# Altium PCB USB-HUB-H.pcbdoc (part 2 of 2)
Units mil, origin at the board's own origin, x right, y up, seen from the top; angles counter-clockwise.
Board outline 2972.16 x 4462.97 mil, 2 copper layers (Top Layer, Bottom Layer); 133 components, 134 nets, 513 pads, 306 vias.
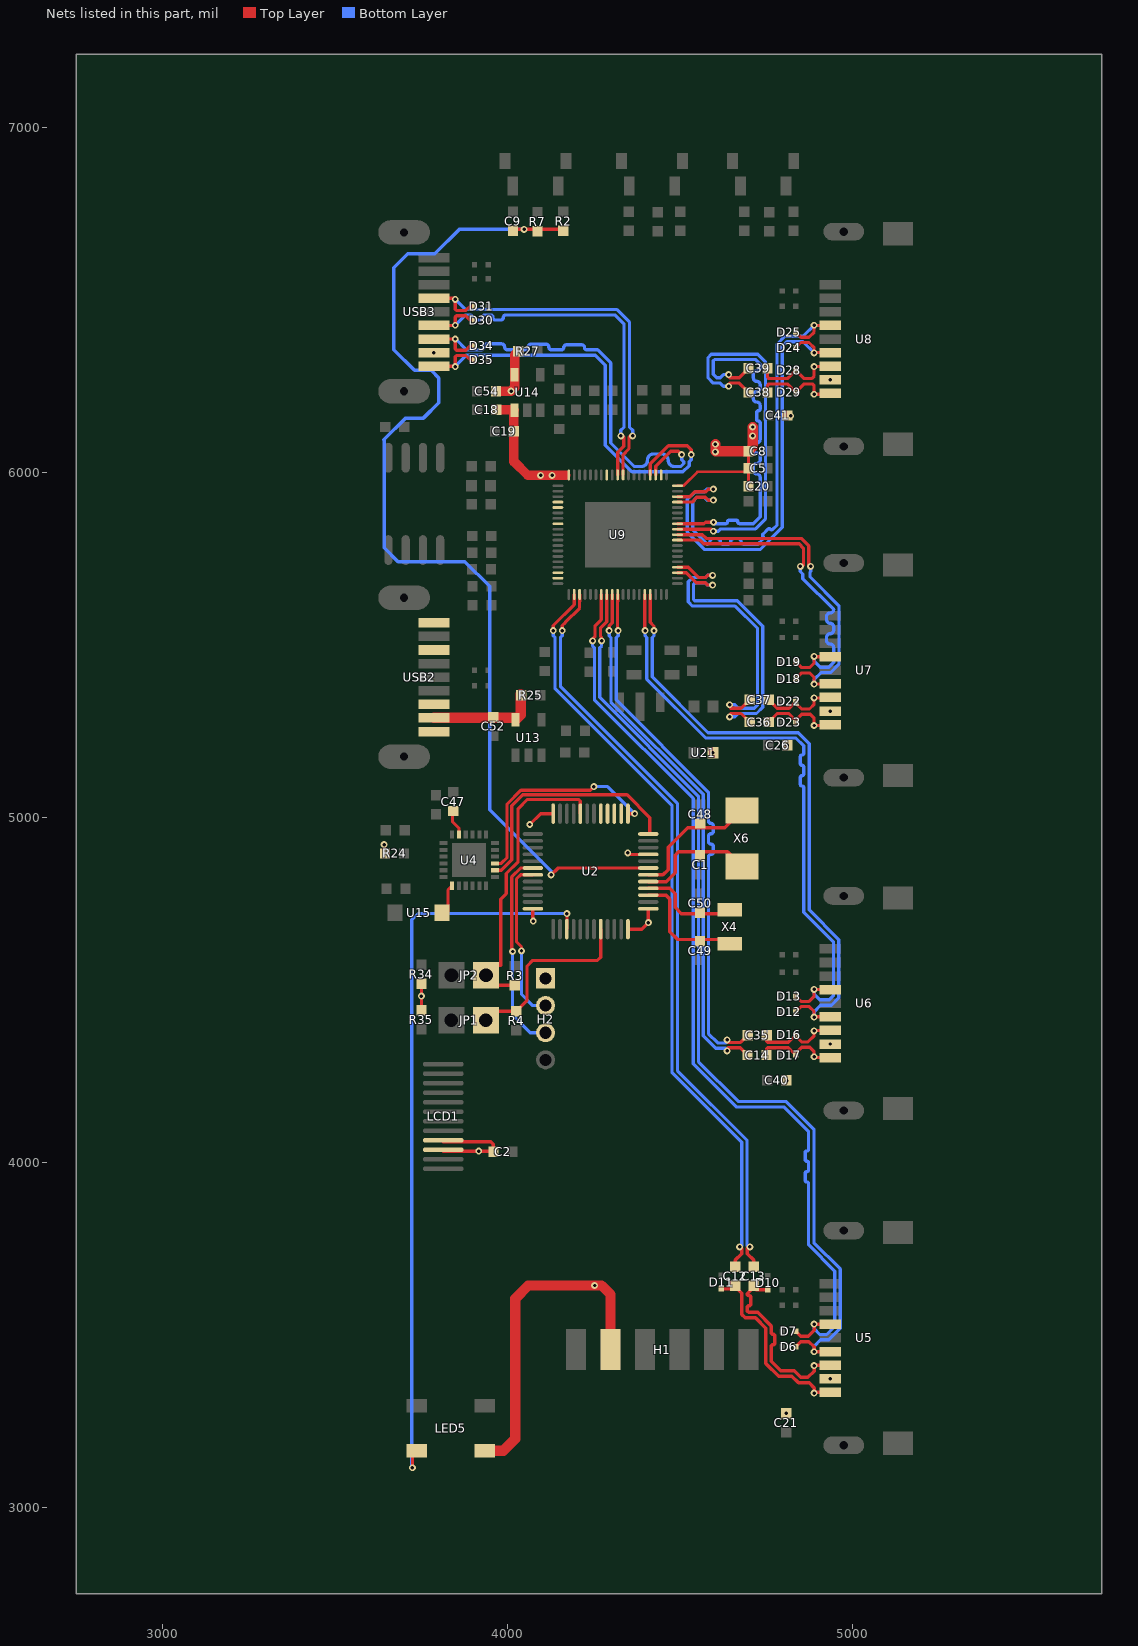
[diagram p2: the nets of this part, all layers, seen from the top]

## Via types
v1: diameter 20, hole 10, Top Layer to Bottom Layer, 300 vias
v2: diameter 18, hole 9, Top Layer to Bottom Layer, 5 vias
v3: diameter 20, hole 9, Top Layer to Bottom Layer, 1 vias

## Nets (pads, with @x,y where several pads share a name; then routed paths per layer and width w, separated by ;. In a path a pad name is that pad's centre, name@x,y a point inside that pad or via, vN(x,y) a via of type N, cw(c..) or ccw(c..) an arc to the next point about the centre after c; other vN are vias at no path point) (continued)
SSTX0_N: D34.2 U9.22 USB3.8 | length 1355.7
  Top Layer w9.53: USB3.8@3787.4,6386.97 v1(3849.09,6387) ; v1(3849.09,6387) 3849.09,6358.13 3852.46,6354.77 3879.91,6354.77 3892.14,6367 D34.2@3904.78,6367 ; U9.22@4429.88,5993.2 4429.88,6013.72 4429.8,6013.8 4429.8,6018.57 4473.23,6062 4495.09,6062 v1(4505.09,6052)
  Bottom Layer w9.5: v1(3849.09,6387) 3850.09,6387 3881.59,6355.5 3923.42,6355.5 ccw(c3923.42,6364.2) 3932.12,6364.2 cw(c3940.83,6364.2) 3940.83,6372.91 3983.42,6372.91 cw(c3983.42,6364.2) 3992.12,6364.2 ccw(c4000.83,6364.2) 4000.83,6355.5 4052.05,6355.5 ccw(c4052.05,6363.75) 4060.3,6363.75 cw(c4068.55,6363.75) 4068.55,6372 4112.05,6372 cw(c4112.05,6363.75) 4120.3,6363.75 ccw(c4128.55,6363.75) 4128.55,6355.5 4156.18,6355.5 ccw(c4156.18,6362.75) 4163.43,6362.75 cw(c4170.68,6362.75) 4170.68,6370 4216.18,6370 cw(c4216.18,6362.75) 4223.43,6362.75 ccw(c4230.68,6362.75) 4230.68,6355.5 4261.59,6355.5 4299.34,6317.75 4299.34,6085.67 4367.51,6017.5 4387.85,6017.5 ccw(c4387.85,6035.75) 4406.1,6035.75 cw(c4424.35,6035.75) 4424.35,6054 4447.85,6054 cw(c4447.85,6035.75) 4466.1,6035.75 ccw(c4484.35,6035.75) 4484.35,6017.5 4502.59,6017.5 4511.34,6026.25 4511.34,6031 4505.09,6037.25 v1(4505.09,6052)
SSTX0_P: D35.2 U9.23 USB3.9 | length 1354.5
  Top Layer w9.53: USB3.9@3787.4,6308.24 3847.85,6308.24 v1(3849.09,6307) 3849.09,6335.87 3852.46,6339.23 3879.91,6339.23 3892.14,6327 D35.2@3904.78,6327 ; U9.23@4414.18,5993.2 4414.18,6013.72 4414.27,6013.8 4414.27,6025 4466.8,6077.53 4521.56,6077.53 4533.09,6066 v1(4533.09,6052)
  Bottom Layer w9.5: v1(3849.09,6307) 3849.09,6308 3881.09,6340 4255.17,6340 4283.84,6311.33 4283.84,6079.25 4361.09,6002 4509.01,6002 4526.84,6019.83 4526.84,6031 4533.09,6037.25 v1(4533.09,6052)
SSTX1_N: C13.1 U9.60 | length 2215.6
  Top Layer w9.5: v1(4159.09,5542) 4159.09,5556.75 4167.59,5565.25 4167.59,5565.59 4209.33,5607.33 4209.33,5626.15 4209.48,5626.3 U9.60@4209.48,5646.8
  Top Layer w10: v1(4703.09,3756) 4699.02,3756 4695.48,3752.46 4695.48,3736.61 4714.09,3718 C13.1@4714.09,3698
  Bottom Layer w9.5: v1(4159.09,5542) 4159.09,5527.25 4153.84,5522 4153.84,5380.13 4492.95,5041.02 4492.95,4267.05 4694.59,4065.41 4694.59,3759.36 4697.95,3756 v1(4703.09,3756)
SSTX1_P: C12.1 U9.59 | length 2216.2
  Top Layer w9.5: v1(4133.09,5542) 4133.09,5556.75 4193.83,5617.49 4193.83,5626.15 4193.68,5626.3 U9.59@4193.68,5646.8
  Top Layer w10: C12.1@4660.87,3698 4660.87,3718 4679.48,3736.61 4679.48,3752.46 4675.95,3756 v1(4673.09,3756)
  Bottom Layer w9.5: v1(4133.09,5542) 4133.09,5527.25 4138.34,5522 4138.34,5373.71 4477.45,5034.6 4477.45,4260.63 4679.09,4058.99 4679.09,3759.36 4675.73,3756 v1(4673.09,3756)
SSTX1_R_N: C13.2 D10.2 U5.8 | length 551.3
  Top Layer w10: C13.2@4714.09,3643 C13.2@4714.09,3639 ; D10.2@4754.09,3632.32 4720.78,3632.32 C13.2@4714.09,3639 ; U5.8@4935.67,3413.26 4889.09,3413.26 v1(4889.09,3412) 4889.09,3396 4870.77,3377.68 4850.48,3377.68 4831.12,3397.04 4792.68,3397.04 4765.09,3424.63 4765.09,3467.43 cw(c4770.09,3467.43) 4770.09,3472.43 ccw(c4770.09,3477.43) 4775.09,3477.43 4775.09,3497.43 ccw(c4770.09,3497.43) 4770.09,3502.43 cw(c4770.09,3507.43) 4765.09,3507.43 4765.09,3526.63 4725.72,3566 4699.09,3566 4695.09,3570 4695.09,3580 cw(c4700.09,3580) 4700.09,3585 ccw(c4700.09,3590) 4705.09,3590 4705.09,3610 ccw(c4700.09,3610) 4700.09,3615 cw(c4700.09,3620) 4695.09,3620 C13.2@4714.09,3639
SSTX1_R_P: C12.2 D11.2 U5.9 | length 554.7
  Top Layer w10: D11.2@4619.87,3634.32 4652.18,3634.32 C12.2@4660.87,3643 4660.87,3639.92 4679.09,3621.7 4679.09,3560 4689.09,3550 4719.09,3550 4749.09,3520 4749.09,3418 4786.05,3381.04 4824.49,3381.04 4843.86,3361.68 4874.42,3361.68 4889.09,3347 v1@4889.09,3334.52 ; v1(4889.09,3332) v1@4889.09,3334.52 ; U5.9@4935.67,3334.52 v1@4889.09,3334.52
SSTX2_N: C35.1 U9.67 | length 1558.6
  Top Layer w9.5: v1@4319.53,5548 4319.53,5626.15 4319.68,5626.3 U9.67@4319.68,5646.8
  Top Layer w9.53: v1(4637.09,4356) 4637.09,4351.82 4640.46,4348.45 4676.05,4348.45 C35.1@4697.09,4369.5
  Bottom Layer w9.5: v1(4321.09,5542) 4321.09,5527.25 4315.84,5522 4315.84,5341.17 4582.95,5074.06 4582.95,4990.34 ccw(c4590.02,4990.34) 4590.02,4983.27 cw(c4590.02,4976.2) 4597.09,4976.2 4597.09,4960.34 cw(c4590.02,4960.34) 4590.02,4953.27 ccw(c4590.02,4946.2) 4582.95,4946.2 4582.95,4930.34 ccw(c4590.02,4930.34) 4590.02,4923.27 cw(c4590.02,4916.2) 4597.09,4916.2 4597.09,4900.34 cw(c4590.02,4900.34) 4590.02,4893.27 ccw(c4590.02,4886.2) 4582.95,4886.2 4582.95,4374.06 4610.05,4346.96 4633.73,4346.96 4637.09,4350.32 v1(4637.09,4356)
SSTX2_P: C14.1 U9.66 | length 1560.4
  Top Layer w9.5: v1(4295.09,5542) 4295.09,5555.44 4303.88,5564.22 U9.66@4303.88,5646.8
  Top Layer w9.53: v1(4637.09,4324) 4637.09,4329.55 4640.46,4332.92 4675.05,4332.92 C14.1@4696.09,4311.87
  Bottom Layer w9.5: v1(4295.09,5542) 4295.09,5527.25 4300.34,5522 4300.34,5334.75 4567.45,5067.64 4567.45,4367.64 4603.63,4331.46 4633.73,4331.46 4637.09,4328.1 v1(4637.09,4324)
SSTX2_R_N: C35.2 D16.2 U6.8 | length 241.1
  Top Layer w9.3: D16.2@4835.81,4367 4853.16,4349.65 4870.74,4349.65 4889.09,4368 v1(4889.09,4382) 4890.35,4383.26 U6.8@4935.67,4383.26
  Top Layer w9.53: C35.2@4752.09,4369.5 4751.59,4369 4751.59,4352.14 4754.96,4348.77 4814.57,4348.77 D16.2@4835.81,4370
SSTX2_R_P: C14.2 D17.2 U6.9 | length 241.1
  Top Layer w9.3: D17.2@4835.81,4317 4853.16,4334.35 4876.74,4334.35 4889.09,4322 v1(4889.09,4307) 4891.57,4304.52 U6.9@4935.67,4304.52
  Top Layer w9.53: C14.2@4751.09,4311.87 4751.09,4329.86 4754.46,4333.23 4814.57,4333.23 D17.2@4835.81,4312
SSTX3_N: C37.1 U9.4 | length 872.8
  Top Layer w9.5: U9.4@4492.88,5725.5 4513.38,5725.5 4513.48,5725.4 4524.65,5725.4 4554.3,5695.75 4574.09,5695.75 4580.34,5702 v1(4595.09,5702)
  Top Layer w9.53: v1(4644.09,5327) 4644.09,5320.64 4647.46,5317.27 4677.48,5317.27 C37.1@4702.22,5342
  Bottom Layer w9.5: v1(4595.09,5702) 4580.34,5702 4574.09,5695.75 4536.67,5695.75 4524.23,5683.31 4524.23,5625.58 4536.67,5613.14 4659.95,5613.14 4725.09,5548 4725.09,5326.75 4715.59,5317.25 4668.59,5317.25 4658.84,5327 v1(4644.09,5327)
SSTX3_P: C36.1 U9.3 | length 872.9
  Top Layer w9.5: U9.3@4492.88,5709.8 4513.38,5709.8 4513.48,5709.9 4518.23,5709.9 4547.88,5680.25 4574.09,5680.25 4580.34,5674 v1(4595.09,5674)
  Top Layer w9.53: v1(4644.09,5292) 4644.09,5298.36 4647.46,5301.73 4677.48,5301.73 C36.1@4702.22,5277
  Bottom Layer w9.5: v1(4595.09,5674) 4580.34,5674 4574.09,5680.25 4543.09,5680.25 4539.73,5676.89 4539.73,5632 4543.09,5628.64 4666.37,5628.64 4740.59,5554.42 4740.59,5320.22 4722.12,5301.75 4668.59,5301.75 4658.84,5292 v1(4644.09,5292)
SSTX3_R_N: C37.2 D22.2 U7.8 | length 232
  Top Layer w9.3: D22.2@4835.81,5332 4853.16,5314.65 4875.74,5314.65 4889.09,5328 v1(4889.09,5347) 4934.41,5347 U7.8@4935.67,5348.26
  Top Layer w9.53: C37.2@4757.22,5342 4781.95,5317.27 4816.36,5317.27 4831.09,5332 4835.81,5332 D22.2@4835.81,5337
SSTX3_R_P: C36.2 D23.2 U7.9 | length 235.8
  Top Layer w9.3: D23.2@4835.81,5282 4853.16,5299.35 4877.74,5299.35 4889.09,5288 v1(4889.09,5267) 4933.15,5267 U7.9@4935.67,5269.52
  Top Layer w9.53: C36.2@4757.22,5277 4781.95,5301.73 4815.36,5301.73 4835.09,5282 4835.81,5282 D23.2@4835.81,5277
SSTX4_N: C39.1 U9.12 | length 1117.9
  Top Layer w9.5: U9.12@4492.88,5851.5 4513.38,5851.5 4513.48,5851.4 4569.74,5851.4 4574.34,5856 v3(4597.09,5856)
  Top Layer w9.53: v1(4641.09,6284) 4641.09,6278.14 4644.46,6274.77 4671.86,6274.77 C39.1@4699.09,6302
  Bottom Layer w9.5: v3(4597.09,5856) 4597.09,5853.66 4598.75,5852 4633.08,5852 ccw(c4633.08,5857) 4638.08,5857 cw(c4643.08,5857) 4643.08,5862 4663.08,5862 cw(c4663.08,5857) 4668.08,5857 ccw(c4673.08,5857) 4673.08,5852 4713.09,5852 4732.59,5871.5 4732.59,5986.44 ccw(c4722.84,5986.44) 4722.84,5996.19 cw(c4722.84,6005.94) 4713.09,6005.94 4713.09,6016.44 cw(c4722.84,6016.44) 4722.84,6026.19 ccw(c4722.84,6035.94) 4732.59,6035.94 4732.59,6046.44 ccw(c4722.84,6046.44) 4722.84,6056.19 cw(c4722.84,6065.94) 4713.09,6065.94 4713.09,6076.44 cw(c4722.84,6076.44) 4722.84,6086.19 ccw(c4722.84,6095.94) 4732.59,6095.94 4732.59,6144.05 ccw(c4727.59,6144.05) 4727.59,6149.05 cw(c4727.59,6154.05) 4722.59,6154.05 4722.59,6174.05 cw(c4727.59,6174.05) 4727.59,6179.05 ccw(c4727.59,6184.05) 4732.59,6184.05 4732.59,6194.55 ccw(c4722.84,6194.55) 4722.84,6204.3 cw(c4722.84,6214.05) 4713.09,6214.05 4713.09,6224.55 cw(c4722.84,6224.55) 4722.84,6234.3 ccw(c4722.84,6244.05) 4732.59,6244.05 4732.59,6254.55 ccw(c4722.84,6254.55) 4722.84,6264.3 cw(c4722.84,6274.05) 4713.09,6274.05 4713.09,6284.55 cw(c4722.84,6284.55) 4722.84,6294.3 ccw(c4722.84,6304.05) 4732.59,6304.05 4732.59,6314.5 4719.73,6327.36 4600.45,6327.36 4597.09,6324 4597.09,6284.25 4606.59,6274.75 4617.09,6274.75 4626.34,6284 v1(4641.09,6284)
SSTX4_P: C38.1 U9.11 | length 1112.8
  Top Layer w9.5: U9.11@4492.88,5835.8 4513.38,5835.8 4513.48,5835.9 4591.35,5835.9 4597.09,5830.16 v1(4597.09,5830)
  Top Layer w9.53: v1(4641.09,6250) 4641.09,6255.86 4644.46,6259.23 4671.86,6259.23 C38.1@4699.09,6232
  Bottom Layer w9.5: v1(4597.09,5830) 4611.84,5830 4618.34,5836.5 4719.51,5836.5 4748.09,5865.08 4748.09,6320.92 4726.15,6342.86 4591.09,6342.86 4581.59,6333.36 4581.59,6274.33 4596.67,6259.25 4617.09,6259.25 4626.34,6250 v1(4641.09,6250)
SSTX4_R_N: C39.2 D28.2 U8.8 | length 260.9
  Top Layer w9.3: D28.2@4835.81,6297 4860.6,6272.2 4881.85,6272.2 4889.09,6279.45 v1(4889.09,6307) 4934.41,6307 U8.8@4935.67,6308.26
  Top Layer w9.53: C39.2@4754.09,6302 4754.09,6275.69 4757.46,6272.32 4811.12,6272.32 D28.2@4835.81,6297
SSTX4_R_P: C38.2 D29.2 U8.9 | length 252.6
  Top Layer w9.3: D29.2@4835.81,6232.11 4860.6,6256.9 4883.6,6256.9 4889.09,6251.41 v1(4889.09,6227) 4933.15,6227 U8.9@4935.67,6229.52
  Top Layer w9.53: C38.2@4754.09,6232 4754.09,6253.42 4757.46,6256.79 4811.12,6256.79 D29.2@4835.81,6232.11
STM-BOOT0: JP1.1 R4.2 U2.44 | length 548.3
  Top Layer w9.5: JP1.1@3938.03,4412.79 3964.24,4439 R4.2@4025.93,4439 4057.09,4470.16 4057.09,4570 4073.09,4586 4261.3,4586 4270.8,4595.5 U2.44@4270.8,4676.83
STM-BOOT1: JP2.1 R3.1 U2.20 | length 854.8
  Top Layer w9.5: R3.1@4021.92,4514 3967.59,4514 JP2.1@3938.26,4543.33 3966.93,4572 3980.92,4572 3980.92,4763.83 3997.09,4780 3997.09,4838 4031.09,4872 4031.09,5026 4057.59,5052.5 4206.59,5052.5 4211.09,5048 4211.09,5012.12 U2.20@4211.74,5011.47
STM-NRST: C9.2 R2.1 R7.2 U2.7 | length 3162.9
  Top Layer w10: C9.2@4021.05,6704.44 v1(4048.45,6704.44) 4163.22,6704.44 R2.1@4163.92,6705.14 ; v1(4127.09,4834) 4147.09,4853.99 U2.7@4408.59,4853.99
  Bottom Layer w10: 3915.56,6704.44 3861.53,6704.44 ; v1(4048.45,6704.44) 3861.53,6704.44 ; v1(4127.09,4834) 4127.09,4844.2 3949.09,5022.2 3949.09,5670 3877.09,5742 3683.09,5742 3643.09,5782 3643.09,6094 3642.09,6095 3705.09,6158 3757.09,6158 3801.09,6202 3801.09,6274 3779.09,6296 3731.09,6296 3671.09,6356 3671.09,6594 3711.37,6634.27 3790.24,6634.27 3860.41,6704.44 3861.53,6704.44
STM-OSC32_IN: C49.2 U2.3 X4.2 | length 350.3
  Top Layer w10: U2.3@4408.59,4775.25 4459.95,4775.25 4471.05,4764.15 4471.05,4669.15 4493.49,4646.71 4633.32,4646.71 X4.2@4645.09,4634.94
STM-OSC32_OUT: C50.2 U2.4 X4.1 | length 294.7
  Top Layer w10: U2.4@4408.59,4794.94 4470.26,4794.94 4486.05,4779.15 4486.05,4740.04 4504.49,4721.59 4633.32,4721.59 X4.1@4645.09,4733.37
STM-OSC_IN: C1.2 U2.5 X6.2 | length 353.7
  Top Layer w10: U2.5@4408.59,4814.62 4460.07,4814.62 4486.05,4840.61 4486.05,4890.57 4496.16,4900.69 4638.12,4900.69 X6.2@4680.05,4858.76
STM-OSC_OUT: C48.2 U2.6 X6.1 | length 386.5
  Top Layer w10: U2.6@4408.59,4834.31 4451.21,4834.31 4466.05,4849.15 4466.05,4914.15 4522.27,4970.38 4630.24,4970.38 X6.1@4680.05,5020.18
STM-RXD1: H2.2 U2.31 | length 475.9
  Top Layer w9.5: v1(4041.09,4614) 4041.09,4625.34 4026.59,4639.84 4026.59,4822.41 4038.5,4834.31 U2.31@4073.95,4834.31
  Bottom Layer w9.5: v1(4041.09,4614) 4041.09,4488 4073.7,4455.39 H2.2@4110.76,4455.39
STM-RXD2: U2.13 U4.21 | length 640.3
  Top Layer w9.5: U4.21@3964.05,4867.16 3982.25,4867.16 3999.09,4884 3999.09,5039.09 4039.5,5079.5 4240.59,5079.5 v1(4251.09,5090) ; U2.13@4349.54,5011.47 v1(4369.09,5011.47)
  Bottom Layer w9.5: v1(4251.09,5090) 4290.57,5090 v1(4369.09,5011.47)
STM-SPI_MISO: U2.16
STM-SPI_MOSI: U2.17
STM-SPI_NSS: U2.14
STM-SPI_SCK: U2.15
STM-TXD1: H2.3 U2.30 | length 589.4
  Top Layer w9.5: v1(4015.09,4612) 4013.09,4614 4013.09,4828 4039.09,4853.99 U2.30@4073.95,4853.99
  Bottom Layer w9.5: v1(4015.09,4612) 4015.09,4428 4066.44,4376.65 H2.3@4110.76,4376.65
STM-TXD2: U2.12 U4.20 | length 707.7
  Top Layer w9.5: U4.20@3964.05,4847.47 3982.56,4847.47 4013.09,4878 4013.09,5034 4045.09,5066 4347.09,5066 4413.09,5000 4413.09,4956.93 U2.12@4408.59,4952.42
TXD1: U4.13 U15.1 | length 87.5
  Top Layer w9.5: U15.1@3828.06,4720 3828.06,4790.48 U4.13@3840.1,4802.51
USBDP_N: D30.2 U9.29 USB3.2 | length 1148.1
  Top Layer w9.53: USB3.2@3787.4,6426.34 3848.44,6426.34 v1(3849.09,6427) 3849.09,6450.87 3852.46,6454.23 3879.91,6454.23 3892.14,6442 D30.2@3904.78,6442 ; U9.29@4319.68,5993.2 4319.68,6013.72 4319.77,6013.8 4319.77,6058.64 4337.09,6075.96 4337.09,6102.63 4333.72,6106 v1(4329.09,6106)
  Bottom Layer w9.53: v1(3849.09,6427) 3878.83,6456.73 3890.99,6456.73 cw(c3890.99,6449.37) 3898.35,6449.37 ccw(c3905.72,6449.37) 3905.72,6442 3920.99,6442 ccw(c3920.99,6449.37) 3928.35,6449.37 cw(c3935.72,6449.37) 3935.72,6456.73 3950.99,6456.73 cw(c3950.99,6449.37) 3958.35,6449.37 ccw(c3965.72,6449.37) 3965.72,6442 3980.99,6442 ccw(c3980.99,6449.37) 3988.35,6449.37 cw(c3995.72,6449.37) 3995.72,6456.73 4311.54,6456.73 4338.33,6429.95 4338.33,6132.01 4329.09,6122.77 v1(4329.09,6106)
USBDP_P: D31.2 U9.28 USB3.3 | length 1148.6
  Top Layer w9.53: USB3.3@3787.4,6505.08 3846.01,6505.08 v1(3849.09,6502) 3849.09,6473.13 3852.46,6469.77 3879.91,6469.77 3892.14,6482 D31.2@3904.78,6482 ; U9.28@4335.38,5993.2 4335.38,6013.72 4335.3,6013.8 4335.3,6052.2 4352.62,6069.53 4352.62,6102.63 4355.99,6106 v1(4363.09,6106)
  Bottom Layer w9.53: v1(3849.09,6502) 3878.83,6472.27 4317.93,6472.27 4353.83,6436.37 4353.86,6132.01 4363.09,6122.77 v1(4363.09,6106)
USBHP1_N: D6.2 U5.2 U9.65 | length 2747.7
  Top Layer w9.5: v1(4273.09,5512) 4273.09,5522.04 4269.77,5525.36 4269.77,5549.32 4288.03,5567.58 4288.03,5626.15 4288.18,5626.3 U9.65@4288.18,5646.8
  Top Layer w10: D6.2@4835.81,3467 4850.31,3481.5 4873.59,3481.5 4889.09,3466 v1(4889.09,3452) 4935.67,3452 U5.2@4935.67,3452.63
  Bottom Layer w9.5: v1(4273.09,5512) 4273.09,5497.25 4267.84,5492 4267.84,5348.16 4553.95,5062.05 4553.95,4293.06 4670.05,4176.96 4808.13,4176.96 4888.59,4096.5 4888.59,3768 4964.59,3692 4964.59,3519.58 4931.51,3486.5 4907.59,3486.5 4889.09,3468 v1(4889.09,3452)
USBHP1_P: D7.2 U5.3 U9.64 | length 2746.8
  Top Layer w9.5: v1(4247.09,5512) 4247.09,5518.18 4254.27,5525.36 4254.27,5555.74 4272.53,5574 4272.53,5626.15 4272.38,5626.3 U9.64@4272.38,5646.8
  Top Layer w10: D7.2@4835.81,3512 4850.31,3497.5 4872.59,3497.5 4889.09,3514 v1@4889.09,3531.37 ; v1(4889.09,3532) v1@4889.09,3531.37 ; U5.3@4935.67,3531.37 v1@4889.09,3531.37
  Bottom Layer w9.5: v1(4247.09,5512) 4247.09,5497.25 4252.34,5492 4252.34,5341.74 4538.45,5055.63 4538.45,4286.64 4663.63,4161.46 4801.71,4161.46 4873.09,4090.08 4873.09,4039.08 cw(c4868.09,4039.08) 4868.09,4034.08 ccw(c4868.09,4029.08) 4863.09,4029.08 4863.09,4009.08 ccw(c4868.09,4009.08) 4868.09,4004.08 cw(c4868.09,3999.08) 4873.09,3999.08 4873.09,3979.08 cw(c4868.09,3979.08) 4868.09,3974.08 ccw(c4868.09,3969.08) 4863.09,3969.08 4863.09,3949.08 ccw(c4868.09,3949.08) 4868.09,3944.08 cw(c4868.09,3939.08) 4873.09,3939.08 4873.09,3761.58 4949.09,3685.58 4949.09,3526 4925.09,3502 4905.66,3502 4889.09,3518.57 v1(4889.09,3532)
USBHP2_N: D12.2 U6.2 U9.73 | length 1785.2
  Top Layer w9.3: D12.2@4835.81,4437 4851,4452.2 4874.9,4452.2 4889.09,4438 v1(4889.09,4422) 4889.72,4422.63 U6.2@4935.67,4422.63
  Top Layer w9.5: U9.73@4414.18,5646.8 4414.18,5626.3 4414.03,5626.15 4414.03,5565.81 4425.09,5554.75 v1(4425.09,5542)
  Bottom Layer w9.5: v1(4425.09,5542) 4425.09,5527.25 4419.84,5522 4419.84,5408 4581.59,5246.25 4842.76,5246.25 4874.59,5214.42 4874.59,4732.42 4960.59,4646.42 4960.59,4477.58 4939.51,4456.5 4907.59,4456.5 4889.09,4438 v1(4889.09,4422)
USBHP2_P: D13.2 U6.3 U9.72 | length 1782.3
  Top Layer w9.3: D13.2@4835.81,4482.69 4851,4467.5 4874.59,4467.5 4889.09,4482 v1(4889.09,4502) 4935.04,4502 U6.3@4935.67,4501.37
  Top Layer w9.5: U9.72@4398.38,5646.8 4398.38,5626.3 4398.53,5626.15 4398.53,5540.23 4399.09,5540.79 v1(4399.09,5542)
  Bottom Layer w9.5: v1(4399.09,5542) 4399.09,5527.25 4404.34,5522 4404.34,5401.58 4575.17,5230.75 4836.34,5230.75 4859.09,5208 4859.09,5186.59 cw(c4854.09,5186.59) 4854.09,5181.59 ccw(c4854.09,5176.59) 4849.09,5176.59 4849.09,5156.59 ccw(c4854.09,5156.59) 4854.09,5151.59 cw(c4854.09,5146.59) 4859.09,5146.59 4859.09,5126.59 cw(c4854.09,5126.59) 4854.09,5121.59 ccw(c4854.09,5116.59) 4849.09,5116.59 4849.09,5096.59 ccw(c4854.09,5096.59) 4854.09,5091.59 cw(c4854.09,5086.59) 4859.09,5086.59 4859.09,4726 4945.09,4640 4945.09,4484 4933.09,4472 4905.66,4472 4889.09,4488.56 v1(4889.09,4502)
USBHP3_N: D18.2 U7.2 U9.10 | length 1012
  Top Layer w9.3: D18.2@4835.81,5402 4853.16,5419.35 4875.74,5419.35 4889.09,5406 v1(4889.09,5387) 4935.04,5387 U7.2@4935.67,5387.63
  Top Layer w9.5: U9.10@4492.88,5820 4513.38,5820 4513.48,5819.9 4565.11,5819.9 4576.05,5808.96 4852.05,5808.96 4873.59,5787.42 4873.59,5731.36 4876.95,5728 v1(4879.09,5728)
  Bottom Layer w9.5: v1(4879.09,5728) 4879.09,5713.25 4877.19,5711.34 4877.19,5697.91 4961.09,5614 4961.09,5444.08 4937.51,5420.5 4909.16,5420.5 4889.09,5400.44 v1(4889.09,5387)
USBHP3_P: D19.2 U7.3 U9.9 | length 1014.3
  Top Layer w9.3: D19.2@4835.81,5452 4853.16,5434.65 4875.74,5434.65 4889.09,5448 v1(4889.09,5467) 4889.72,5466.37 U7.3@4935.67,5466.37
  Top Layer w9.5: U9.9@4492.88,5804.3 4513.38,5804.3 4513.48,5804.4 4558.69,5804.4 4569.63,5793.46 4845.63,5793.46 4858.09,5781 4858.09,5731.36 4854.73,5728 v1(4849.09,5728)
  Bottom Layer w9.5: v1(4849.09,5728) 4849.09,5713.25 4856.34,5706 4856.34,5692.56 4945.59,5603.31 cw(c4935.34,5603.31) 4935.34,5593.06 ccw(c4935.34,5582.81) 4925.09,5582.81 4925.09,5573.31 ccw(c4935.34,5573.31) 4935.34,5563.06 cw(c4935.34,5552.81) 4945.59,5552.81 4945.59,5543.31 cw(c4935.34,5543.31) 4935.34,5533.06 ccw(c4935.34,5522.81) 4925.09,5522.81 4925.09,5513.31 ccw(c4935.34,5513.31) 4935.34,5503.06 cw(c4935.34,5492.81) 4945.59,5492.81 4945.59,5450.5 4931.09,5436 4906.66,5436 4889.09,5453.56 v1(4889.09,5467)
USBHP4_N: D24.2 U8.2 U9.17 | length 1383.6
  Top Layer w9.3: D24.2@4835.81,6362 4850.66,6376.85 4874.24,6376.85 4889.09,6362 v1(4889.09,6347) 4889.72,6347.63 U8.2@4935.67,6347.63
  Top Layer w9.5: U9.17@4492.88,5930.2 4513.38,5930.2 4513.48,5930.1 4529.09,5930.1 ; 4529.19,5930.1 4543.63,5944.54 4574.88,5944.54 4582.34,5952 v1(4597.09,5952)
  Bottom Layer w9.5: 4569.34,5943.75 4577.59,5952 v1(4597.09,5952) ; 4571.09,5943.5 4542.67,5943.5 4521.59,5922.42 4521.59,5827.58 4572.42,5776.75 4732.26,5776.75 4797.09,5841.58 4797.09,6366 4810.34,6379.25 4856.84,6379.25 v1(4889.09,6347)
USBHP4_P: D25.2 U8.3 U9.16 | length 1385.1
  Top Layer w9.3: D25.2@4835.81,6407 4850.66,6392.15 4874.24,6392.15 4889.09,6407 v1(4889.09,6427) 4889.72,6426.37 U8.3@4935.67,6426.37
  Top Layer w9.5: U9.16@4492.88,5914.5 4513.38,5914.5 4513.48,5914.6 4535.61,5914.6 4549.26,5928.25 4574.09,5928.25 4582.34,5920 v1(4597.09,5920)
  Bottom Layer w9.5: v1(4597.09,5920) 4579.09,5920 4571.09,5928 4549.09,5928 4537.09,5916 4537.09,5834 4578.84,5792.25 ccw(c4578.84,5800.61) 4587.2,5800.61 cw(c4595.55,5800.61) 4595.55,5808.96 4608.84,5808.96 cw(c4608.84,5800.61) 4617.2,5800.61 ccw(c4625.55,5800.61) 4625.55,5792.25 4638.84,5792.25 ccw(c4638.84,5800.61) 4647.2,5800.61 cw(c4655.55,5800.61) 4655.55,5808.96 4668.84,5808.96 cw(c4668.84,5800.61) 4677.2,5800.61 ccw(c4685.55,5800.61) 4685.55,5792.25 4725.84,5792.25 4740.98,5807.39 ccw(c4737.45,5810.92) 4740.98,5814.46 cw(c4744.52,5818) 4740.98,5821.53 4755.12,5835.67 cw(c4758.66,5832.14) 4762.2,5835.67 ccw(c4765.73,5839.21) 4769.27,5835.67 4781.59,5848 4781.59,6372.5 4803.84,6394.75 4856.84,6394.75 v1(4889.09,6427)
VBUS_IN1: C52.2 R25.2 U13.5 USB2.1 | length 318.8
  Top Layer w30: USB2.1@3787.4,5288.9 4018.11,5288.9 U13.5@4023.82,5283.19 4038.89,5298.25 R25.2@4038.89,5357
VBUS_IN2: C54.2 R27.2 U14.5 USB3.1 | length 168.6
  Top Layer w27.56: C54.2@3967.16,6236 v1(4011.09,6236) 4021.09,6246 4021.09,6341 R27.2@4032.09,6352
  other v1: 3787.4,6347.6
VBUSDET: U9.31
VCC: C2.2 H1.3 H2.1 LCD1.3 LCD1.4 LED5.1 R24.2 R34.2 R35.1 U2.1 U2.9 U2.24 U2.36 U2.48 U21.2 | length 1670.1
  Top Layer w9.5: R35.1@3751.09,4442 v1(3751.09,4482.79) R34.2@3751.09,4519 ; LCD1.3@3814.26,4033.43 v1(3917.25,4033.43) 3958.33,4033.43 C2.2@3959.09,4032.67 ; LCD1.4@3814.26,4060.99 3952.1,4060.99 3959.09,4054 C2.2@3959.09,4032.67 ; C2.2@3959.76,4032 C2.2@3959.09,4032.67 ; v1(4065.09,4980) 4096.57,5011.47 U2.24@4133,5011.47 ; v1@4073.95,4706 U2.36@4073.95,4735.88 ; v1(4349.09,4898) 4353.73,4893.36 U2.9@4408.59,4893.36 ; U2.48@4349.54,4676.83 4389.93,4676.83 v1(4408.59,4695.5) U2.1@4408.59,4735.88
  Top Layer w10: v1(3643.09,4922) 3643.09,4898.55 R24.2@3645.64,4896
  Top Layer w30: LED5.1@3934.09,3165.03 3988.13,3165.03 4022.58,3199.49 4022.58,3605.49 4061.09,3644 v1(4253.09,3644) 4273.09,3644 4299.09,3618 H1.3@4299.09,3458.54
  other v1: 4075.09,4700 4595.72,5188.14
VCC_OUT: C5.1 C8.1 C18.1 C19.1 C20.1 C21.1 C26.1 C40.1 C41.1 U5.1 U6.1 U7.1 U8.1 U9.19 U9.38 U14.1 | length 898.6
  Top Layer w8: U9.19@4492.88,5961.7 4510.79,5961.7 4551.09,6002 C5.1@4699.09,6002 ; 4681.09,6068 4687.09,6062 4699.09,6050 C5.1@4699.09,6012 C5.1@4699.09,6002 ; C20.1@4699.09,5960 C5.1@4699.09,6002
  Top Layer w27.56: C18.1@3968.16,6182 U14.1@4019.32,6182 ; U14.1@4020.51,6180.81 U14.1@4019.32,6182 ; 4169.09,5992 v1(4129.79,5992) v1(4096.21,5992) 4059.09,5992 4019.32,6031.77 U14.1@4019.32,6182
  Top Layer w30: v1(4603.09,6082) 4603.09,6062 4687.09,6062 C8.1@4699.09,6062 4711.09,6074 v1(4711.09,6106) v1(4711.09,6132)
  other v1: 4808.57,3274 4935.67,3373.89 4810.06,4237.51 4935.67,4343.89 4811.09,5210 4935.67,5308.89 4603.09,6060 4821.09,6164 4935.67,6268.89
VDD: C47.2 U4.5 | length 76.1
  Top Layer w9: C47.2@3843.17,5019 3841.09,5016.93 3841.09,4988 3859.79,4969.31 U4.5@3859.79,4951.47
WS2812B_SDA: LED5.4 U2.39 | length 2144.8
  Top Layer w9: v1(3725.09,3116) 3725.09,3152.89 LED5.4@3737.24,3165.03 ; U2.39@4172.37,4676.83 v1(4172.37,4722)
  Bottom Layer w9: v1(3725.09,3116) 3723.09,3118 3723.09,4704 3741.09,4722 v1(4172.37,4722)
"": U9.21 U9.42 U9.43 U9.46 U9.55 U9.56 USB2.5 USB2.6 USB2.8 USB2.9

## Polygon pours and split planes (outlines as drawn)
GND on Bottom Layer (solid, remove dead copper, pour order 0): 3581.09,6944 3581.09,3014 3591.09,3004 5331.37,3004 5331.37,6944
GND on Top Layer (solid, remove dead copper, pour order 1): 3581.09,6940 3581.09,3010 3591.09,3000 5331.37,3000 5331.37,6940
GND on Inner2 (split plane): 4769.19,3041.71 4769.19,3377 ccw(c4764.14,3382.05) 4759.09,3387.1 4147.98,3387.1 ccw(c4142.93,3382.05) 4137.88,3377 4137.88,3042.1 3589.19,3042.1 3589.19,5161.02 ccw(c3575.93,5179.01) 3596.71,5170.78 3596.71,5643.22 ccw(c3575.93,5634.99) 3589.19,5652.98 3589.19,6219.72 ccw(c3575.93,6237.72) 3596.71,6229.49 3596.71,6701.93 ccw(c3575.93,6693.7) 3589.19,6711.69 3589.19,6931.9 5319.27,6931.9 5319.27,6722.43 5319.27,6664.81 4995.51,6664.81 ccw(c4990.46,6659.77) 4985.41,6654.72 4985.41,6119.28 ccw(c4990.46,6114.23) 4995.51,6109.18 5319.27,6109.18 5319.27,6051.57 5319.27,5762.63 ccw(c5320.28,5762.52) 5319.27,5762.43 5319.27,5704.81 4995.51,5704.81 ccw(c4990.46,5699.77) 4985.41,5694.72 4985.41,5159.28 ccw(c4990.46,5154.23) 4995.51,5149.18 5319.27,5149.18 5319.27,5091.57 5319.27,5086.57 5319.27,4797.63 ccw(c5320.28,4797.52) 5319.27,4797.43 5319.27,4739.81 4995.51,4739.81 ccw(c4990.46,4734.77) 4985.41,4729.72 4985.41,4194.28 ccw(c4990.46,4189.23) 4995.51,4184.18 5319.27,4184.18 5319.27,4126.57 5319.27,4121.57 5319.27,3827.63 ccw(c5320.28,3827.52) 5319.27,3827.43 5319.27,3769.82 4995.51,3769.82 ccw(c4990.46,3764.76) 4985.41,3759.72 4985.41,3224.28 ccw(c4990.46,3219.23) 4995.51,3214.18 5319.27,3214.18 5319.27,3156.57 5319.27,3042.09
VCC_OUT on Inner2 (split plane): 4795.82,3248.1 4793.19,3250.73 4793.19,3585.95 ccw(c4796.48,3594.33) 4801.19,3602 ccw(c4796.48,3609.67) 4793.19,3618.05 4793.19,4385.95 ccw(c4796.48,4394.33) 4801.19,4402 ccw(c4796.48,4409.67) 4793.19,4418.05 4793.19,6228 ccw(c4788.14,6233.05) 4783.09,6238.1 4740.12,6238.1 ccw(c4738.03,6233.05) 4732.98,6235.14 4731.45,6233.61 ccw(c4733.54,6228.56) 4728.49,6226.47 4728.49,6054.02 4715.11,6040.65 4690.39,6040.65 4690.39,6087.27 ccw(c4690.13,6087.65) 4690.45,6087.98 4690.45,6132.64 ccw(c4690.18,6133.06) 4690.35,6133.52 ccw(c4680.63,6130.13) 4689.23,6135.78 4689.09,6135.93 4689.09,6137.76 ccw(c4668.48,6148.22) 4691.19,6143.93 4691.19,6270.9 4705.91,6285.61 4960.85,6285.61 4960.99,6285.47 4960.99,6250.53 4960.57,6250.1 4849.36,6250.1 ccw(c4847.26,6245.05) 4842.21,6247.14 4832.66,6237.59 ccw(c4834.76,6232.54) 4829.71,6230.45 4829.71,5733.31 ccw(c4829.98,5730.57) 4828.99,5728 ccw(c4829.98,5725.43) 4829.71,5722.69 4829.71,5333.79 ccw(c4834.76,5328.74) 4839.81,5323.69 4960.77,5323.69 4966.99,5317.47 4966.99,5294.53 4962.57,5290.1 4844.46,5290.1 ccw(c4842.37,5285.05) 4837.32,5287.14 4832.66,5282.48 ccw(c4834.76,5277.43) 4829.71,5275.34 4829.71,4371 ccw(c4834.76,4365.95) 4839.81,4360.9 4958.83,4360.9 4961.61,4358.12 4961.61,4327.14 4958.57,4324.1 4899.66,4324.1 ccw(c4898.19,4339.03) 4889.09,4327.1 ccw(c4880,4339.03) 4878.53,4324.1 4843.46,4324.1 ccw(c4841.37,4319.05) 4836.32,4321.14 4832.66,4317.48 ccw(c4834.76,4312.43) 4829.71,4310.34 4829.71,3408.94 ccw(c4834.76,3406.85) 4832.66,3401.8 4839.25,3395.21 ccw(c4844.3,3397.3) 4846.4,3392.25 4885.33,3392.25 ccw(c4887.34,3393.45) 4889.09,3391.9 ccw(c4890.84,3393.45) 4892.85,3392.25 4965.69,3392.25 4966.99,3392.19 4966.99,3358.1 4848.46,3358.1 ccw(c4846.37,3353.05) 4841.32,3355.14 4832.66,3346.49 4832.66,3346.48 ccw(c4834.76,3341.43) 4829.71,3339.34 4829.71,3250.63 4827.17,3248.1
+5V on Inner2 (split plane): 4129.62,3526.1 3646.38,4009.34 3646.38,4694.37 3734.03,4780.34 ccw(c3687.13,4822.59) 3741.19,4790 3741.19,4943 3791.09,4943 3791.09,4763.66 3704.26,4676.83 ccw(c3705.09,4674.83) 3703.09,4674 3703.09,4463.13 ccw(c3723.71,4452.66) 3700.99,4456.96 3700.99,4017.66 ccw(c3706.04,4015.57) 3703.95,4010.52 4162.99,3551.47 4162.99,3526.1
VCC on Inner2 (split plane): 254 vertices, not listed, extent 3620.19,3621.1 4621.99,5222.9
GND on Inner2 (split plane): 3713.56,4517.54 3713.19,4517.17 3713.19,4671.47 3798.23,4756.52 ccw(c3796.14,4761.57) 3801.19,4763.66 3801.19,4942.9 4047.99,4942.9 4047.99,4632.88 ccw(c4044.65,4634.12) 4041.09,4634.1 ccw(c4037.01,4623.89) 4026.92,4628.25 ccw(c3510.81,3061.98) 4015.09,4632.1 ccw(c4005.04,4622.05) 3994.99,4612 ccw(c4005.04,4601.95) 4015.09,4591.9 ccw(c4019.17,4602.11) 4029.27,4597.75 ccw(c4545.38,6164.02) 4041.09,4593.9 ccw(c4044.65,4593.88) 4047.99,4595.12 4047.99,4536.11 4030.98,4519.1 3986.36,4519.1 3986.36,4581.33 ccw(c3981.31,4586.38) 3976.26,4591.43 3900.26,4591.43 ccw(c3895.21,4586.38) 3890.16,4581.33 3890.16,4519.1 3886.36,4519.1 3886.36,4581.33 ccw(c3881.31,4586.38) 3876.26,4591.43 3800.26,4591.43 ccw(c3795.21,4586.38) 3790.16,4581.33 3790.16,4519.1 3719.16,4519.1 ccw(c3718.51,4518.22) 3717.75,4519 3717.09,4519 ccw(c3716.06,4516.5) 3713.56,4517.54
3V3 on Inner2 (split plane): 4577.34,5302.46 4573.99,5305.8 4573.99,5346.29 4614.58,5386.87 ccw(c4616.22,5372.56) 4625.09,5383.9 ccw(c4635.14,5393.95) 4645.19,5404 ccw(c4633.11,5407.18) 4639.73,5417.78 4643.26,5715.9 ccw(c4642.25,5715.97) 4643.26,5716.02 4643.26,5968.34 ccw(c4629.34,5967) 4641.03,5974.66 4641.03,6112 ccw(c4639.06,6112.82) 4639.88,6114.78 4625.88,6128.78 ccw(c4623.91,6127.97) 4623.09,6129.94 4065.09,6129.94 ccw(c4064.28,6127.97) 4062.31,6128.78 4014.31,6080.78 ccw(c4015.12,6078.82) 4013.16,6078 4013.16,5958.72 ccw(c4024.84,5951.05) 4010.93,5952.4 4010.93,5756.16 3975.19,5756.16 3975.19,5826.34 ccw(c3970.14,5828.43) 3972.23,5833.48 3966.58,5839.14 ccw(c3961.53,5837.05) 3959.44,5842.1 3747.62,5842.1 3745.19,5844.53 3745.19,5875.47 3749.62,5879.9 3954.19,5879.9 ccw(c3957.53,5882.94) 3961.99,5883.59 3972.9,5896.85 ccw(c3963.61,5903.8) 3975.19,5903.27 3975.19,5982.79 ccw(c3978.18,5982.58) 3981.09,5981.9 ccw(c3991.14,5991.95) 4001.19,6002 ccw(c3991.14,6012.05) 3981.09,6022.1 ccw(c3978.18,6021.42) 3975.19,6021.21 3975.19,6097.72 ccw(c3975.16,6099.47) 3974.6,6101.13 ccw(c3973.93,6101.97) 3974.96,6102.26 4034.53,6161.83 ccw(c4034.4,6162.83) 4034.59,6161.84 4058.21,6161.84 ccw(c4058.73,6162.77) 4059.34,6161.9 4173.09,6161.9 ccw(c4178.14,6166.95) 4183.19,6172 4183.19,6742 4183.19,6765.47 4195.62,6777.9 4882.57,6777.9 4890.99,6769.47 4890.99,6738.53 4886.57,6734.1 4242.63,6734.1 ccw(c4239.27,6731.08) 4234.81,6730.4 4229.28,6723.65 ccw(c4238.8,6716.64) 4226.99,6717.25 4226.99,6292.03 ccw(c4313.85,6256.48) 4222.99,6280 ccw(c4313.85,6303.52) 4226.99,6267.97 4226.99,6175.66 ccw(c4232.04,6173.57) 4229.95,6168.52 4233.61,6164.86 ccw(c4238.66,6166.95) 4240.75,6161.9 4648.32,6161.9 ccw(c4648.8,6162.81) 4648.94,6161.79 4673.95,6136.78 ccw(c4668.44,6120.1) 4679.18,6134.01 ccw(c4679.61,6132.38) 4680.35,6130.87 4680.35,6088.39 ccw(c4681.22,6087.78) 4680.29,6087.27 4680.29,6038.55 ccw(c4679.7,6036.34) 4681.11,6034.55 ccw(c4679.7,6032.75) 4680.29,6030.55 4680.29,5415.48 ccw(c4681.22,5414.97) 4680.35,5414.35 4680.35,5407.64 4614.56,5341.85 ccw(c4616.65,5336.8) 4611.6,5334.71 4611.6,5302.46
1V2 on Inner2 (split plane): 4173.26,5670.88 4173.26,5699.84 4425.46,5699.84 ccw(c4427.55,5704.89) 4432.6,5702.8 4438.3,5708.49 ccw(c4436.21,5713.54) 4441.26,5715.63 4441.26,5792.05 ccw(c4298.8,5845.61) 4445.19,5804 ccw(c4298.8,5762.39) 4441.26,5815.95 4441.26,5932.06 ccw(c4436.21,5937.11) 4431.16,5942.16 4220.72,5942.16 ccw(c4218.63,5937.11) 4213.58,5939.2 4204.54,5930.16 ccw(c4206.63,5925.11) 4201.58,5923.02 4201.58,5803.2 4200.54,5802.16 4171.26,5802.16 4171.26,5952.4 ccw(c4170.51,5953.33) 4171.06,5954.4 4184.72,5968.06 4451.46,5968.06 4452.28,5967.24 ccw(c4465.97,5970.09) 4455.18,5961.2 4470.93,5945.45 4470.93,5690.55 4451.26,5670.88
VCC_OUT on Inner2 (split plane): 4177.58,5975.2 4164.35,5961.98 ccw(c4162.77,5962.3) 4161.16,5962.5 4023.26,5962.5 4023.26,6075.45 4067.65,6119.84 4248.51,6119.84 ccw(c4204.55,6134.86) 4243.24,6109.14 ccw(c4240.16,6109.57) 4237.09,6110.1 ccw(c4227.04,6100.05) 4216.99,6090 ccw(c4221.84,6082.43) 4224.93,6074 ccw(c4221.84,6065.57) 4216.99,6058 ccw(c4227.04,6047.95) 4237.09,6037.9 ccw(c4242.38,6035.17) 4245.93,6039.95 ccw(c4427.29,6267.34) 4265.09,6025.9 ccw(c4275.14,6035.95) 4285.19,6046 ccw(c4275.14,6056.05) 4265.09,6066.1 ccw(c4259.81,6068.83) 4256.26,6064.05 ccw(c4325.69,6120.36) 4249.26,6074 ccw(c4245.12,6085.2) 4256.95,6086.86 ccw(c4260.03,6086.43) 4263.09,6085.9 ccw(c4273.14,6095.95) 4283.19,6106 ccw(c4271.42,6109.32) 4277.67,6119.84 4314.51,6119.84 ccw(c4320.76,6109.32) 4308.99,6106 ccw(c4319.04,6095.95) 4329.09,6085.9 ccw(c4339.19,6087.7) 4346.09,6095.28 ccw(c4353,6087.7) 4363.09,6085.9 ccw(c4373.14,6095.95) 4383.19,6106 ccw(c4371.42,6109.32) 4377.67,6119.84 4396.72,6119.84 ccw(c4394.26,6111.23) 4388.99,6104 ccw(c4399.04,6093.95) 4409.09,6083.9 ccw(c4414.76,6091.36) 4424.09,6090.62 ccw(c4433.43,6091.36) 4439.09,6083.9 ccw(c4449.14,6093.95) 4459.19,6104 ccw(c4453.93,6111.23) 4451.47,6119.84 4620.54,6119.84 4630.93,6109.45 4630.93,5978.44 4462.32,5978.44 ccw(c4454.65,5993.46) 4456.68,5976.71 ccw(c4455.66,5983.15) 4451.46,5978.16 4184.72,5978.16 ccw(c4182.63,5973.11) 4177.58,5975.2
VBUS_IN2 on Inner2 (split plane): 3844.45,6224.1 3769.19,6299.36 3769.19,6360.64 3776.45,6367.9 3801.74,6367.9 3808.99,6360.64 3808.99,6298.83 ccw(c3814.04,6296.74) 3811.95,6291.69 3844.78,6258.86 ccw(c3849.83,6260.95) 3851.92,6255.9 4027.74,6255.9 4036.99,6246.64 4036.99,6233.36 4027.74,6224.1
GND on Inner1 (split plane): 5319.27,3042.09 4769.19,3041.71 4769.19,3377 ccw(c4764.14,3382.05) 4759.09,3387.1 4147.98,3387.1 ccw(c4142.93,3382.05) 4137.88,3377 4137.88,3042.1 3589.19,3042.1 3589.19,5161.02 ccw(c3575.93,5179.01) 3596.71,5170.78 3596.71,5643.22 ccw(c3575.93,5634.99) 3589.19,5652.98 3589.19,6219.72 ccw(c3575.93,6237.72) 3596.71,6229.49 3596.71,6701.93 ccw(c3575.93,6693.7) 3589.19,6711.69 3589.19,6931.9 5319.27,6931.9 5319.27,6722.43 5319.27,6664.81 4995.51,6664.81 ccw(c4990.46,6659.77) 4985.41,6654.72 4985.41,6119.28 ccw(c4990.46,6114.23) 4995.51,6109.18 5319.27,6109.18 5319.27,6051.57 5319.27,5762.63 ccw(c5320.28,5762.52) 5319.27,5762.43 5319.27,5704.81 4995.51,5704.81 ccw(c4990.46,5699.77) 4985.41,5694.72 4985.41,5159.28 ccw(c4990.46,5154.23) 4995.51,5149.18 5319.27,5149.18 5319.27,5091.57 5319.27,5086.57 5319.27,4797.63 ccw(c5320.28,4797.52) 5319.27,4797.43 5319.27,4739.81 4995.51,4739.81 ccw(c4990.46,4734.77) 4985.41,4729.72 4985.41,4194.28 ccw(c4990.46,4189.23) 4995.51,4184.18 5319.27,4184.18 5319.27,4126.57 5319.27,4121.57 5319.27,3827.63 ccw(c5320.28,3827.52) 5319.27,3827.43 5319.27,3769.82 4995.51,3769.82 ccw(c4990.46,3764.76) 4985.41,3759.72 4985.41,3224.28 ccw(c4990.46,3219.23) 4995.51,3214.18 5319.27,3214.18 5319.27,3156.57

## Keep-outs
Board Outline Layer:
  lines w10 net "": 5329.37,3156.57 5329.37,3032 4759.09,3031.61 4759.09,3377 4147.98,3377 4147.98,3032 3579.09,3032 3579.09,6942 5329.37,6942 5329.37,6722.43 ; 5329.37,3827.43 5329.37,4121.57 ; 5329.37,4792.43 5329.37,5086.57 ; 5329.37,5757.43 5329.37,6051.57

## Other copper
Top Layer:
  drawing of 472 lines, arcs and shapes, not listed
Bottom Layer:
  drawing of 118 lines, arcs and shapes, not listed
Inner2 (plane layer: these items are gaps in the copper):
  lines w4 net "": 3761.09,6296 3761.09,6364 3773.09,6376 3805.09,6376 3817.09,6364 3817.09,6298 3851.09,6264 4031.09,6264 4045.09,6250 4045.09,6230 4031.09,6216 3841.09,6216 3761.09,6296
  lines w7.87 net "": 3967.09,6101.11 4033.98,6168 4058.92,6168 ; 3969.09,5750 4017.09,5750 4017.09,6078 4065.09,6126 4623.09,6126 4637.09,6112 4637.09,5716 4633.52,5414.44 ; 3969.09,6105.11 4031.98,6168 ; 3974.16,5651 3974.16,5651.06 ; 4651.45,6168 4686.45,6133 4686.45,5414.77 ; 4165.09,5798 4165.09,5954 4183.09,5972 4453.09,5972 4477.09,5948 4477.09,5688 4453.81,5664.72 4167.09,5664.72 4167.09,5706 4427.09,5706 4435.09,5714 4435.09,5936 4219.09,5936 4207.74,5924.65 4207.74,5800.65 4203.09,5796 4167.09,5796 4165.09,5798
  lines w8 net "": 3731.09,4786 3640.28,4696.93 3640.28,4006.82 4127.09,3520 4169.09,3520 4169.09,3554 3707.09,4016 3707.09,4674 3795.09,4762 3795.09,4945.69 ; 3735.09,4786 3735.09,4948 ; 3969.09,5750 3969.09,5828 3961.09,5836 3745.09,5836 3739.09,5842 3739.09,5878 3747.09,5886 3956.08,5886 3969.09,5901.83 3969.09,6101.11 ; 4017.09,5956.4 4167.38,5956.4 4183.32,5972.34 4637.09,5972.34 ; 4058.92,6168 4177.09,6168 4177.09,6742 4177.09,6768 4193.09,6784 4885.09,6784 4897.09,6772 4897.09,6736 4889.09,6728 4240.73,6728 4233.09,6718.68 4233.09,6174 4239.09,6168 4649.09,6168 4651.09,6166 ; 4633.52,5414.44 4567.9,5348.81 4567.9,5303.27 4574.81,5296.36 4617.7,5296.36 4617.7,5336.37 4686.45,5405.12 4686.45,5414.77 ; 4686.45,6034.55 4717.64,6034.55 4734.59,6051.5 4734.59,6228.13 4738.46,6232 4785.09,6232 4787.09,6230 4787.09,3248.2 4793.29,3242 4829.7,3242 4835.81,3248.11 4835.81,3341 4846.81,3352 4973.09,3352 4973.09,3398 4965.84,3398.35 4844.74,3398.35 4835.81,3407.29 4835.81,4312 4841.81,4318 4961.09,4318 4967.71,4324.61 4967.71,4360.65 4961.36,4367 4835.81,4367 4835.81,5277 4842.81,5284 4965.09,5284 4973.09,5292 4973.09,5320 4963.3,5329.79 4838.01,5329.79 4835.81,5332 4835.81,6232.11 4847.7,6244 4963.09,6244 4967.09,6248 4967.09,6288 4963.38,6291.71 4703.38,6291.71 4685.09,6273.43 4685.09,6134 4686.45,6132.64 4686.45,6087.98
  lines w10 net "": 3615.09,4876 3623.93,4867.16 3666.32,4867.16 3679.09,4879.93 3679.09,4942 3685.09,4948 4053.09,4948 4053.09,4534 4033.09,4514 3717.09,4514 3709.09,4506 3709.09,4466.03 3723.09,4452.03 4107.09,4452.03 4107.09,4080 4099.09,4072 3883.09,4072 3871.09,4060 3871.09,4020 3885.09,4006 4115.09,4006 4115.09,3754 4225.09,3644 4225.09,3618 4227.09,3616 4279.09,3616 4285.09,3622 4285.09,3668 4165.09,3788 4165.09,4656 4419.09,4656 4441.09,4678 4441.09,4720.95 4389.09,4720.95 4389.09,4900 4627.09,5138 4627.09,5222 4621.09,5228 4575.09,5228 4567.9,5220.8 4567.9,5172.8 4321.09,4926 4321.09,4718 4316.25,4713.15 4109.77,4713.15 4109.77,5006.82 4089.58,5027.01 3650.1,5027.01 3615.09,4992 3615.09,4876

## Silkscreen, mask and mechanical layers (free items; w line width, h text height)
Top Silkscreen Layer:
  text "JLCJLCJLCJLC" at 3680.75,5288.28 h39.37 r90
  text "USB-HUB-ROG" at 3650.52,3498.54 h67.97
  text "Drawn by Mr.Han" at 3633.2,3430.54 h67.97
Mechanical Layer:
  circle w1 net "": c5119.33,4947 r122.05
  circle w1 net "": c5134.33,3982 r122.05
  circle w1 net "": c5134.09,5912 r122.05

## Text inside footprints (layer, text, board x,y; h text height)
JP1: Top Silkscreen Layer "2" at 3828.03,4321.63 h18.99 r180; Top Silkscreen Layer "1" at 3928.03,4321.63 h18.99 r180
JP2: Top Silkscreen Layer "2" at 3828.26,4452.17 h18.99 r180; Top Silkscreen Layer "1" at 3928.26,4452.17 h18.99 r180
LCD1: Bottom Silkscreen Layer "1.3寸LCD" at 3540.78,4387.84 h83.83 r90; Top Silkscreen Layer "1" at 3745.36,3972 h29.9 r270; Top Silkscreen Layer "12" at 3741.01,4271.56 h30.14 r270